# Altium PCB Schéma_TC1.PcbDoc
Units mil, origin at the board's own origin, x right, y up, seen from the top; angles counter-clockwise.
Board outline 6000 x 4000 mil, 2 copper layers (Top Layer, Bottom Layer); 6 components, 10 nets, 15 pads, 0 vias.
Unrouted connection lines stored in the file: 5.
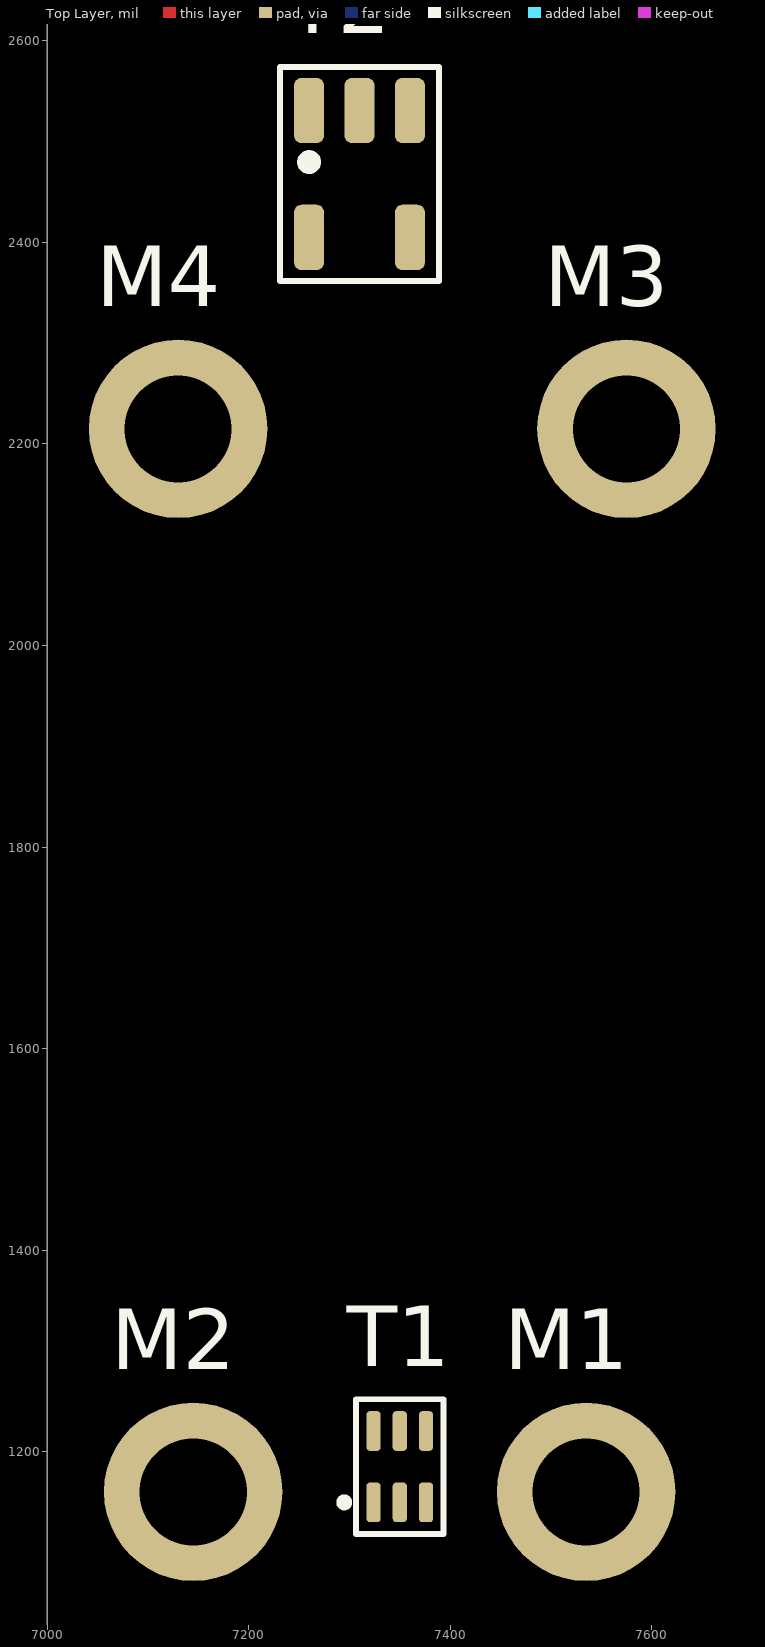
[diagram p0: Top Layer view]
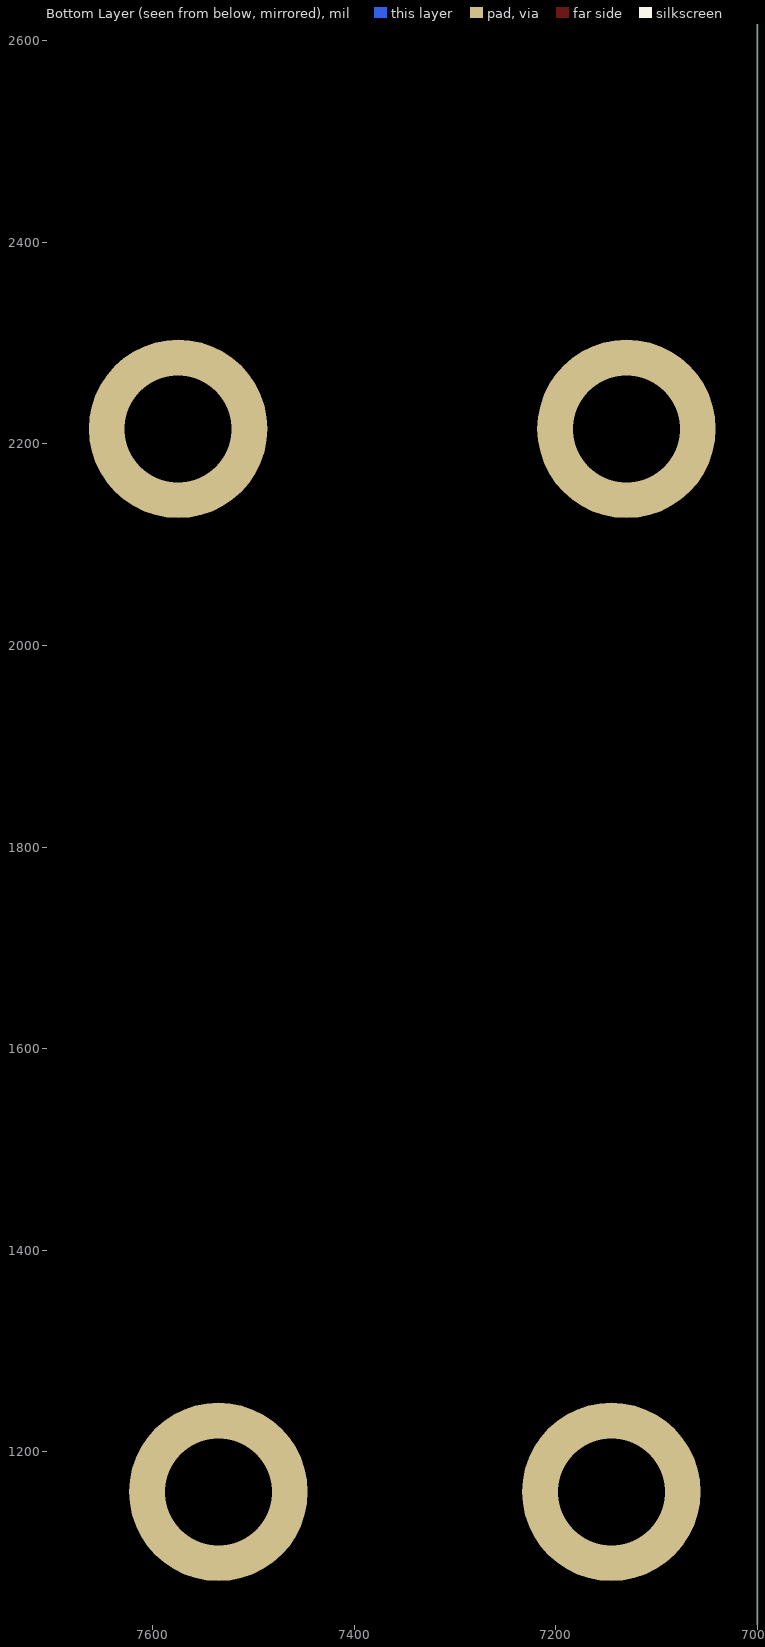
[diagram p1: Bottom Layer view, seen from below]

## Layer stack, top to bottom
Top Solder: solder mask 0.4, Solder Resist, Dk 3.5
Top Layer: signal copper 1.4
Dielectric 1: dielectric 12.6, FR-4, Dk 4.8
Bottom Layer: signal copper 1.4
Bottom Solder: solder mask 0.4, Solder Resist, Dk 3.5

## Board outline
1000,1000 7000,1000 7000,5000 1000,5000

## Design rules (kind name [scope] priority, off if disabled: settings)
Clearance [All] p1: gap=10 ignorepadtopadclearanceinfootprint=FALSE except(0: Arc-Hole Track-Hole SMDPad-Hole THPad-Hole Via-Hole Fill-Hole Poly-Hole Region-Hole Text-Hole)
PolygonConnect [All] p1: connectstyle=Relief reliefconductorwidth=10 reliefentries=4 polygonreliefangle="90 Angle" airgapwidth=10
RoomDefinition schéma_NCS2 [InComponentClass('schéma_NCS2')] p1: confinementstyle=ConfineIn formatcopy=TRUE lockcomponents=FALSE outline 7045,1060 7635,1060 7635,1360 7045,1360
RoutingVias [All] p1: holewidth=28 width=50 viastyle="Through Hole" minholewidth=28 minwidth=50 maxholewidth=28 maxwidth=50
SolderMaskExpansion [All] p1: expansion=4
Width [All] p1: maxlimit=10 minlimit=10 preferedwidth=10
30 further rules are at their usual default settings.

## Classes and differential pairs
component class schéma_TC1: J3 J4 M3 M4 T2
component class schéma_NCS2: J1 J2 M1 M2 T1

## Components (designator, comment, footprint, x,y, rotation, side; value= is the part's Value field where it differs from the comment)
M1 "=Value" "Screw Hex Socket M2.5X4 Connected" 7535,1160 r0 top
M2 "=Value" "Screw Hex Socket M2.5X4 Connected" 7145,1160 r0 top
M3 "=Value" "Screw Hex Socket M2.5X4 Connected" 7575,2215 r0 top
M4 "=Value" "Screw Hex Socket M2.5X4 Connected" 7130,2215 r0 top
T1 "{Value}" NCS2-771-75+ 7350,1185 r0 top
T2 "{Value}" TC1-1TG2+ 7310,2467.99 r0 top

## Footprints (in the part's own frame and the unit in brackets; to place one, negate y for a bottom-side part, rotate by r counter-clockwise, add the part's x,y. Pads: shape width x height; smd on the part's side, far side on the other; paste and mask are expansions set on the pad)
NCS2-771-75+ [mm] "Mini-Circuits RF Transformer"
  rrect50% 0.36x1 smd: 1(-0.66,-0.9) 2(0,-0.9) 3(0.66,-0.9) 4(0.66,0.9) 5(0,0.9) 6(-0.66,0.9)
  silkscreen extent -1.5,-1.7 1.1,1.7, body extent -1,-0.6 1,0.6, height 0.94
"Screw Hex Socket M2.5X4 Connected" [mm] "Screw Hex Socket M2.5X4 Connected BN610"
  round 4.5 hole 2.7 paste-5 mask+0: 1(0,0)
  body extent -2.25,-2.25 2.25,2.25, height 2.5
TC1-1TG2+ [mm] "Mini-Circuits RF Transformer"
  rrect50% 0.76x1.65 smd: 1(-1.27,1.6) 2(0,1.6) 3(1.27,1.6) 4(1.27,-1.6) 6(-1.27,-1.6)
  silkscreen extent -2,-2.7 2,2.7, body extent -1.9,-1.9 1.9,1.9, height 3.81

## Part data
M1 M2 M3 M4: library part "Screw Hex Socket Connected", "Screw Hex Socket Connected BN610"
T1: library part NCS2-771-75+, "Mini-Circuits RF Transformer"
T2: library part TC1-1TG2+, "Mini-Circuits RF Transformer"

## Nets (pads, with @x,y where several pads share a name; then routed paths per layer and width w, separated by ;. In a path a pad name is that pad's centre, name@x,y a point inside that pad or via, vN(x,y) a via of type N, cw(c..) or ccw(c..) an arc to the next point about the centre after c; other vN are vias at no path point)
GND: M2.1 T1.1 T1.3
NetJ1_1: T1.4
NetJ1_2: 
NetJ2_1: T1.6
NetJ3_1: T2.1
NetJ3_2: 
NetJ4_1: T2.3
NetM1_1: M1.1 T1.2
NetM3_1: M3.1 T2.6
NetM4_1: M4.1 T2.4
pads on no net: T1.5 T2.2